# Altium PCB ice.PcbDoc (part 2 of 2)
Units mm, origin at the board's own origin, x right, y up, seen from the top; angles counter-clockwise.
Board outline 65 x 30 mm, 4 copper layers (Top Layer, GND, L3, Bottom Layer), stack 1.576 mm thick; 116 components, 101 nets, 444 pads, 153 vias.
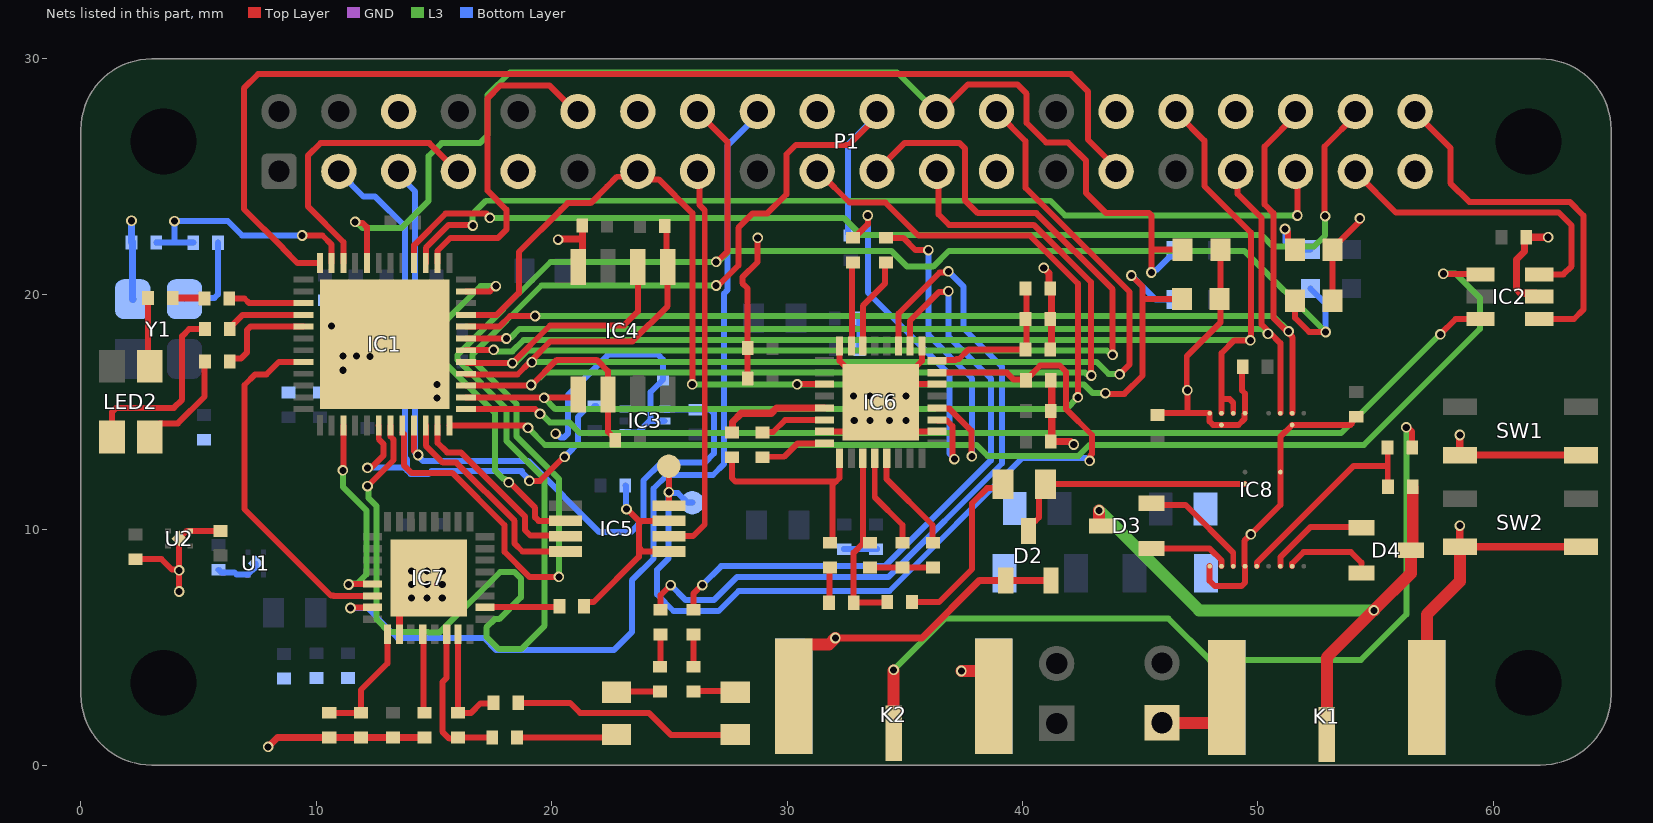
[diagram p4: the nets of this part, all layers, seen from the top]

## Via types
v1: diameter 0.45, hole 0.3, Top Layer to Bottom Layer, 153 vias

## Nets (pads, with @x,y where several pads share a name; then routed paths per layer and width w, separated by ;. In a path a pad name is that pad's centre, name@x,y a point inside that pad or via, vN(x,y) a via of type N, cw(c..) or ccw(c..) an arc to the next point about the centre after c; other vN are vias at no path point) (continued)
D11: IC1.3 IC7.21 | length 8.7
  Top Layer w0.254: v1(11.125,12.525) 11.15,12.55 IC1.3@11.15,14.425 ; v1@11.375,7.7 11.379,7.696 IC7.21@12.387,7.696
  L3 w0.254: v1(11.125,12.525) 11.125,11.825 12.125,10.825 12.125,8.1 11.738,7.713 11.413,7.713 v1(11.375,7.675)
DAC_CS: IC1.23 IC5.2 | length 15.5
  Top Layer w0.254: IC1.23@16.35,20.125 17.375,20.125 17.625,20.375 v1@17.625,20.4 ; v1(18.175,12.01) 18.215,12.01 19.293,10.932 19.293,10.524 19.442,10.375 IC5.2@20.575,10.375
  L3 w0.254: v1(17.625,20.35) 16.975,20.35 15.484,18.859 15.484,17.066 17.6,14.95 17.6,12.511 17.963,12.148 18.024,12.148 18.162,12.01 v1(18.175,12.01)
dac_g: C41.2 IC5.8 IC6.15 SP1.1 SP2.1 | length 39.1
  Top Layer w0.254: IC5.8@24.975,11.025 v1(24.975,11.6) SP1.1@24.975,12.7 ; IC6.15@36.363,16.67 39.33,16.67 39.625,16.375 40.15,16.375 40.175,16.35 40.175,16.4 40.75,16.975 41.575,16.975 41.85,16.7 41.85,15.125 42.95,14.025 42.95,13.211 42.884,13.144 42.884,12.966 v1(42.846,12.929)
  Bottom Layer w0.254: SP2.1@25.975,11.15 25.773,11.15 25.361,11.562 25.013,11.562 v1(24.975,11.6) 24.95,11.575 24.95,8.775 24.475,8.3 24.475,7.25 25.175,6.55 27.087,6.55 27.937,7.4 34.35,7.4 40,13.05 42.725,13.05 v1(42.846,12.929)
DAC_HV: IC5.6 P1.15 | length 16.7
  Top Layer w0.254: IC5.6@24.975,9.725 26,9.725 26.5,10.225 26.5,23.575 26.27,23.805 P1.15@26.27,25.125
DAC_MOSI: IC1.10 IC5.4 | length 9.1
  Top Layer w0.254: IC1.10@14.65,14.425 14.65,13.575 15.375,12.85 15.95,12.85 18.425,10.375 18.425,9.406 18.756,9.075 IC5.4@20.425,9.075
DAC_SCLK: IC1.11 IC5.3 | length 8
  Top Layer w0.254: IC1.11@15.15,14.425 15.15,13.689 15.555,13.284 16.141,13.284 18.859,10.566 18.859,9.99 19.099,9.75 20.4,9.75 IC5.3@20.425,9.725
DCLK: IC1.44 IC7.22 | length 15.1
  Top Layer w0.254: IC1.44@9.45,17.125 9.448,17.123 8.405,17.123 7.882,16.6 7.4,16.6 6.95,16.15 6.95,10.875 10.625,7.2 10.725,7.2 10.737,7.188 IC7.22@12.387,7.188
DONE: IC1.7 LED1.2 P1.16 R4.1 | length 87.8
  Top Layer w0.254: v1(12.172,11.853) 13.284,12.965 13.284,13.83 13.152,13.962 13.152,14.423 IC1.7@13.15,14.425 ; P1.16@26.27,27.665 27.475,26.46 27.475,21.834 27.075,21.434 27.034,21.434 v1(26.981,21.381) ; LED1.2@51.575,19.725 51.575,19 52.175,18.4 v1(52.875,18.4)
  L3 w0.254: v1(12.172,11.853) 12.21,11.815 12.21,11.354 12.559,11.005 12.559,6.191 13.1,5.65 14.75,5.65 14.775,5.625 15.225,5.625 17.8,8.2 18.425,8.2 18.691,7.934 18.691,7.125 17.766,6.2 17.575,6.2 17.225,5.85 17.225,5.45 17.75,4.925 18.7,4.925 19.7,5.925 19.7,12.15 18.075,13.775 18.075,15.15 16.005,17.22 16.005,17.43 19.95,21.375 26.975,21.375 v1(26.981,21.381) ; v1@27.075,21.375 27.55,21.85 34.425,21.85 35.1,21.175 36.2,21.175 36.875,21.85 49.425,21.85 v1(52.875,18.4)
  Bottom Layer w0.254: R4.1@52.225,20.25 52.875,19.6 v1(52.875,18.4)
EA_CLK: IC1.36 P1.29 | length 49.7
  Top Layer w0.254: IC1.36@10.15,21.325 9.2,21.325 8.575,21.95 8.575,21.975 6.925,23.625 6.925,28.75 7.525,29.35 42.05,29.35 42.775,28.625 42.775,26.575 44.05,25.3 P1.29@44.05,25.125
F_CS: IC1.16 IC4.1 P1.26 R13.1 | length 52
  Top Layer w0.254: IC1.16@16.35,16.625 16.381,16.594 18.544,16.594 19.065,17.115 v1(19.16,17.115) ; v1@19.112,17.162 19.95,18 23.425,18 24.925,19.5 24.925,21.157 IC4.1@24.93,21.162 24.865,21.227 24.865,22.835 R13.1@24.8,22.9 ; P1.26@38.97,27.665 40.125,26.51 40.125,24.525 44.55,20.1 44.55,17.025 v1(44.125,16.6)
  L3 w0.254: v1(19.16,17.115) 19.169,17.125 43.15,17.125 43.65,16.625 44.1,16.625 v1(44.125,16.6)
F_MISO: IC1.17 IC4.2 P1.21 | length 53.2
  Top Layer w0.254: IC1.17@16.35,17.125 16.4,17.075 v1(18.325,17.075) 19.925,18.675 23.064,18.675 23.66,19.271 IC4.2@23.66,21.162 ; P1.21@33.89,25.125 33.89,25.34 34.975,26.425 37.326,26.425 37.55,26.201 37.55,24 38.1,23.45 40.586,23.45 43.825,20.211 v1(43.825,17.425)
  L3 w0.254: v1(18.325,17.075) 18.363,17.113 18.476,17.113 18.98,17.616 43.581,17.616 43.772,17.425 v1(43.825,17.425)
F_MOSI: IC1.14 IC4.5 P1.19 | length 45.7
  Top Layer w0.254: IC1.14@16.35,15.625 21.007,15.625 IC4.5@21.12,15.738 ; P1.19@31.35,25.125 31.425,25.125 32.65,23.9 34.175,23.9 35.575,22.5 40.309,22.5 42.35,20.459 v1(42.35,15.625)
  L3 w0.254: v1(19.675,15.6) 20.15,15.125 41.85,15.125 v1(42.35,15.625)
F_SCLK: IC1.15 IC4.6 P1.23 R14.2 | length 47.2
  Top Layer w0.254: IC1.15@16.35,16.125 19.125,16.125 20.216,17.216 21.909,17.216 22.39,16.735 IC4.6@22.39,15.738 22.39,14.16 22.7,13.85 R14.2@22.7,13.8 ; P1.23@36.43,25.125 36.43,23.395 36.875,22.95 40.472,22.95 42.9,20.522 42.9,16.575 v1(42.925,16.55)
  L3 w0.254: v1(19.125,16.15) 19.178,16.15 19.703,16.675 42.661,16.675 42.749,16.588 42.887,16.588 v1(42.925,16.55)
GND: C1.1 C2.1 C3.1 C4.1 C5.1 C6.1 C7.1 C8.1 C9.1 C10.1 C11.1 C12.1 C13.1 C14.2 C15.2 C16.2 C17.1 C18.2 C19.2 C20.2 C31.2 C32.2 C33.1 C34.1 C35.2 C36.2 C37.1 C38.1 C39.1 C40.1 C41.1 C42.1 C43.1 C44.1 C45.1 C48.1 C49.1 C50.1 C51.1 C52.1 C53.1 C54.2 C55.2 C56.2 C57.2 D2.1 D2.2 IC1.49 IC2.2 IC3.2 IC3.4 IC4.4 IC5.5 IC5.7 IC6.10 IC6.14 IC6.17 IC6.24 IC6.31 IC6.33 IC7.26 IC7.33 IC8.A1 IC8.A4 IC8.B2 IC8.B8 IC8.F7 IC8.P1 IC8.P4 K1.2 K2.2 K4.1 LED1.1 LED3.1 LED4.1 LED5.1 P1.6 P1.9 P1.14 P1.20 P1.25 P1.30 P1.34 P1.39 R16.2 R24.1 SW1.1 SW1.2 SW2.1 SW2.2 U1.2 U1.5 U2.2 U2.5 Y1.2 | length 156.4
  Top Layer w0.254: C12.1@2.325,8.75 3.425,8.75 3.863,8.313 4.137,8.313 v1(4.175,8.275) ; v1(4.175,7.375) v1(4.175,8.275) ; C13.1@5.925,9.95 U2.2@4.65,9.95 4.5,9.95 U2.5@4.175,9.625 v1(4.175,8.275) ; C31.2@21.375,6.75 21.375,6.8 21.498,6.923 21.773,6.923 23.7,8.85 23.7,9.25 ; v1@23.125,10.95 23.7,10.375 ; IC5.5@24.975,9.075 23.875,9.075 23.7,9.25 ; IC5.7@24.975,10.375 23.7,10.375 ; C40.1@28.325,16.425 C39.1@28.325,17.725 28.325,20.25 28.1,20.475 28.1,20.725 28.75,21.375 28.75,22.375 v1@28.725,22.4 ; IC6.31@31.587,14.18 32.73,14.18 IC6.33@33.975,15.425 ; IC6.24@32.222,17.813 32.222,17.178 IC6.33@33.975,15.425 ; IC6.17@35.728,17.813 35.728,17.178 IC6.33@34.737,16.187 ; IC6.10@36.363,14.18 35.22,14.18 IC6.33@33.975,15.425 ; IC6.14@36.363,16.187 IC6.33@34.737,16.187 ; C36.2@45.725,14.875 45.799,14.949 46.874,14.949 ; C36.2@45.8,14.95 46.95,14.95 ; IC8.P1@47.95,8.45 47.95,7.825 48.175,7.6 49.301,7.6 49.45,7.749 IC8.P4@49.45,8.45 49.425,8.475 49.425,9.525 v1(49.7,9.8) 50.95,11.05 IC8.F7@50.95,12.45 50.95,13.95 IC8.B8@51.45,14.45 53.925,14.45 54.002,14.527 54.002,14.664 54.125,14.787 C35.2@54.175,14.787 ; LED3.1@48.4,21.9 48.4,19.8 48.4,18.8 46.975,17.375 46.975,15.95 v1(47,15.925) 47,15 46.95,14.95 ; C32.2@49.325,16.925 49.325,15.914 49.45,15.789 IC8.A4@49.45,14.95 49.425,14.925 49.425,14.7 49.175,14.45 IC8.B2@48.45,14.45 48.099,14.45 47.95,14.599 IC8.A1@47.95,14.95 46.95,14.95 ; LED1.1@53.175,19.725 LED5.1@53.175,21.9 53.175,21.95 54.325,23.1 v1(54.325,23.225) ; 23.7,9.25 23.7,10.375 ; IC6.33@33.975,15.425 IC6.33@34.737,16.187
  Top Layer w0.305: v1(7.95,0.775) 8.35,1.175 C20.2@10.55,1.175 R16.2@14.6,1.175 ; IC7.26@13.53,5.562 13.53,6.705 IC7.33@14.775,7.95 ; v1@20.275,22.35 20.277,22.352 21.3,22.352 ; IC4.4@21.12,21.162 21.12,21.6 21.3,21.779 21.3,22.352 ; C16.2@21.3,22.925 21.3,22.352 ; v1(32.05,5.4) 35.725,5.4 38.175,7.85 39.39,7.85 D2.2@41.31,7.85 ; v1(40.9,21.125) 41.127,20.898 41.127,20.348 41.225,20.25 41.225,18.95 C48.1@41.225,17.65 ; C41.1@41.225,16.35 41.237,16.337 41.237,13.762 41.25,13.75 42.044,13.75 v1(42.175,13.619) ; v1@58.575,14 SW1.1@58.575,13.173 SW1.2@63.725,13.173 ; v1@58.6,10.175 58.575,10.15 SW2.1@58.575,9.275 SW2.2@63.725,9.275 ; IC2.2@61.95,19.9 61.802,20.048 61.163,20.048 60.984,20.226 60.984,21.484 61.325,21.825 61.325,22.35 C14.2@61.4,22.425 v1(62.325,22.425)
  Top Layer w0.508: K2.2@30.275,2.925 30.275,4.575 30.821,5.121 31.771,5.121 v1(32.05,5.4) ; v1(37.4,4) 38.229,4 38.775,3.454 K2.2@38.775,2.925 ; K4.1@45.925,1.8 48.129,1.8 48.675,2.346 K1.2@48.675,2.875 ; K1.2@57.175,2.875 57.175,6.4 58.575,7.8 SW2.1@58.575,9.275
  Bottom Layer w0.254: C10.1@5.85,8.3 5.973,8.177 6.531,8.177 6.608,8.1 U1.2@7.1,8.1 7.425,8.425 U1.5@7.425,8.575 ; C7.1@10.375,19.75 C2.1@11.675,19.75 C1.1@12.975,19.75 ; v1(10.65,18.65) v1@10.688,18.688 ; C9.1@15.1,19.75 15.125,19.725 15.125,17.175 C5.1@15.15,17.15 15.138,17.137 15.138,16.188 v1(15.125,16.175) ; v1(20.167,14.081) 20.22,14.081 20.375,13.926 20.526,13.926 20.684,14.084 20.684,15.709 22.425,17.45 24.5,17.45 24.725,17.225 C15.2@24.725,16.425 24.725,16.375 24.2,15.85 24.2,14.674 24.151,14.625 ; IC3.4@23.124,14.125 23.651,14.125 24.125,14.599 24.151,14.625 ; C17.1@23.125,11.875 23.15,11.85 23.15,10.9 v1(23.175,10.875) ; IC3.2@24.8,14.625 24.151,14.625 ; C52.1@32.425,9.175 C53.1@33.775,9.175 C53.1@33.825,9.175 ; C51.1@33.075,17.675 C50.1@33.075,18.975 ; v1@35.038,14.631 v1(35.05,14.644) v1@35.088,14.606
  Bottom Layer w0.305: C57.2@2.15,22.2 v1(2.15,23.125) ; C57.2@2.175,22.225 2.187,22.213 2.187,19.804 Y1.2@2.2,19.791
  other v1: 14.05,7.1 14.7,7.1 15.35,7.1 14.05,7.675 14.7,7.675 15.35,7.675 14.05,8.25 14.7,8.25 15.35,8.25 58.575,10.175 58.575,14.025 32.85,14.644 33.525,14.644 34.35,14.644 15.125,15.6 32.825,15.675 33.525,15.675 34.35,15.675 35.05,15.675 11.125,16.775 12.275,17.35 11.125,17.375 11.7,17.375 20.275,22.325 28.75,22.4
HILO: IC1.21 IC6.27 LED4.2 P1.13 R9.1 | length 50.9
  Top Layer w0.254: IC1.21@16.35,19.125 17.661,19.125 18.6,20.064 18.6,21.8 20.4,23.6 20.675,23.875 21.65,23.875 22.35,24.575 22.769,24.994 23.599,24.994 23.73,25.125 P1.13@23.73,24.98 ; P1.13@23.7,25.095 23.7,24.728 23.859,24.887 24.538,24.887 25.975,23.45 25.975,16.181 v1(25.969,16.175) ; v1@30.387,16.187 IC6.27@31.587,16.187 ; v1(43.519,15.801) 43.545,15.775 44.325,15.775 45.1,16.55 45.1,19.8 ; v1(44.619,20.801) 45.1,20.32 45.1,19.8 ; LED4.2@46.775,19.8 45.1,19.8
  L3 w0.254: v1(25.969,16.175) v1(30.425,16.175) 42.6,16.175 42.975,15.8 v1@43.475,15.8
  Bottom Layer w0.254: v1@44.575,20.85 45.65,19.775 R9.1@46.525,19.775
HV_EN: IC1.34 P1.7 | length 12.4
  Top Layer w0.254: IC1.34@11.15,21.325 11.15,22.225 9.65,23.725 9.65,25.9 10.175,26.425 14.8,26.425 P1.7@16.1,25.125
ICE_CS: IC1.32 LED3.2 P1.24 R8.1 | length 51.1
  Top Layer w0.254: v1(11.65,23.075) 11.687,23.038 11.962,23.038 12.15,22.85 IC1.32@12.15,21.325 ; P1.24@36.43,27.665 37.681,28.916 39.776,28.916 40.175,28.517 40.175,27.275 41,26.45 41.925,26.45 42.7,25.675 42.7,24.3 43.55,23.45 45.375,23.45 45.469,23.356 45.469,21.85 ; v1(45.469,20.926) 45.469,21.85 ; LED3.2@46.8,21.9 45.519,21.9 45.469,21.85
  L3 w0.254: v1(11.65,23.075) 11.703,23.075 11.969,22.809 13.609,22.809 14.775,23.975 14.775,25.875 15.325,26.425 16.95,26.425 17.275,26.75 17.275,28.475 18.225,29.425 34.67,29.425 P1.24@36.43,27.665
  Bottom Layer w0.254: v1@45.55,21 45.575,21.025 45.675,21.025 R8.1@46.525,21.875
Lblue: IC1.41 R5.2 | length 4.3
  Top Layer w0.254: R5.2@6.325,17.15 6.44,17.265 6.79,17.265 7.05,17.525 7.05,18.476 7.199,18.625 IC1.41@9.45,18.625
Lgreen: IC1.40 R7.2 | length 3.4
  Top Layer w0.254: R7.2@6.325,18.525 6.325,18.575 6.875,19.125 IC1.40@9.45,19.125
Lred: IC1.39 R2.2 | length 3.2
  Top Layer w0.254: R2.2@6.25,19.85 R2.2@6.275,19.825 ; R2.2@6.35,19.825 6.95,19.825 7.15,19.625 IC1.39@9.45,19.625
NetC19_1: C19.1 C20.1 IC7.25 | length 5.2
  Top Layer w0.254: C20.1@10.55,2.225 C19.1@11.9,2.225 11.9,3.2 13.025,4.325 13.025,5.56 IC7.25@13.022,5.562
NetC21_1: C21.1 IC6.30 | length 2.8
  Top Layer w0.254: C21.1@28.95,14.15 29.4,14.15 29.913,14.663 IC6.30@31.587,14.663
NetC21_2: C21.2 IC6.32 | length 2.9
  Top Layer w0.254: C21.2@28.95,13.1 29.875,13.1 30.447,13.672 IC6.32@31.587,13.672
NetC22_1: C22.1 IC6.29 | length 4.6
  Top Layer w0.305: C22.1@27.65,14.125 27.675,14.15 27.675,14.575 28.05,14.95 29.325,14.95 29.546,15.171 IC6.29@31.587,15.171
NetC22_2: C22.2 IC6.1 R17.1 | length 9.1
  Top Layer w0.254: C22.2@27.65,13.075 27.65,12.199 27.799,12.05 32.074,12.05 ; R17.1@31.825,9.45 31.925,9.55 31.925,11.901 32.074,12.05 ; IC6.1@32.222,13.037 32.222,12.199 32.074,12.05
NetC23_1: C23.1 C25.1 C28.1 IC6.3 | length 7.7
  Top Layer w0.254: IC6.3@33.213,13.037 33.213,9.413 32.825,9.025 C23.1@32.825,6.9 32.837,6.912 34.238,6.912 C25.1@34.25,6.925
NetC23_2: C23.2 R17.2 | length 1.5
  Top Layer w0.254: C23.2@31.775,6.9 31.8,6.925 31.8,8.375 R17.2@31.825,8.4
NetC24_1: C24.1 IC7.30 R18.2 | length 6.5
  Top Layer w0.254: IC7.30@15.537,5.562 15.537,3.712 15.35,3.525 15.35,1.425 15.65,1.125 15.975,1.125 C24.1@16.025,1.175 R18.2@17.475,1.175
NetC24_2: C24.2 IC7.31 R15.2 | length 5
  Top Layer w0.254: IC7.31@16.02,5.562 16.022,5.56 16.022,2.228 C24.2@16.025,2.225 16.575,2.225 16.975,2.625 17.5,2.625 R15.2@17.525,2.65
NetC25_2: C25.2 L3.2 | length 7.8
  Top Layer w0.254: C25.2@35.3,6.925 36.45,6.925 37.85,8.325 37.85,11.125 38.493,11.768 39.293,11.768 L3.2@39.375,11.85
NetC26_1: C26.1 L1.1 | length 1.8
  Top Layer w0.254: C26.1@26.025,3.15 27.75,3.15 L1.1@27.8,3.1
NetC26_2: C26.2 R19.2 | length 1.4
  Top Layer w0.254: C26.2@26.025,4.175 R19.2@26.025,5.55
NetC27_1: C27.1 L2.1 | length 1.9
  Top Layer w0.254: L2.1@22.75,3.1 22.775,3.125 C27.1@24.6,3.125
NetC27_2: C27.2 R20.2 | length 1.4
  Top Layer w0.254: C27.2@24.6,4.175 24.613,4.187 24.613,5.537 R20.2@24.625,5.55
NetC28_2: C28.2 C29.2 C30.2 | length 2.7
  Top Layer w0.254: C28.2@33.525,8.4 C30.2@36.2,8.4
NetC29_1: C29.1 IC6.4 | length 4.1
  Top Layer w0.254: IC6.4@33.721,13.037 33.721,11.379 34.9,10.2 C29.1@34.9,9.45
NetC30_1: C30.1 IC6.5 | length 4.4
  Top Layer w0.254: IC6.5@34.229,13.037 34.229,12.146 36.175,10.2 36.175,9.475 C30.1@36.2,9.45
NetC31_1: C31.1 IC7.2 | length 3.2
  Top Layer w0.254: IC7.2@17.163,6.705 17.185,6.728 20.303,6.728 C31.1@20.325,6.75
NetC46_1: C46.1 IC6.11 | length 15.4
  Top Layer w0.254: C46.1@32.8,22.4 32.85,22.4 33.425,22.975 v1(33.425,23.35) ; IC6.11@36.363,14.663 36.388,14.638 36.785,14.638 37.025,14.398 37.025,13.128 37.062,13.091 37.062,12.987 v1@37.025,12.949
  Bottom Layer w0.254: v1(33.425,23.35) 33.425,20.075 36.891,16.609 36.891,13.247 37.1,13.038 v1(37.1,13)
NetC46_2: C46.2 IC6.23 | length 3.6
  Top Layer w0.254: IC6.23@32.73,17.813 32.756,17.838 32.756,21.306 C46.2@32.8,21.35
NetC47_1: C47.1 IC6.12 | length 14.5
  Top Layer w0.254: C47.1@34.2,22.4 34.925,22.4 35.45,21.875 v1(36,21.875) ; IC6.12@36.363,15.171 36.388,15.146 36.891,15.146 37.825,14.212 37.825,13.144 v1(37.85,13.119)
  Bottom Layer w0.254: v1(36,21.875) 36,18.275 37.85,16.425 37.85,13.15 v1(37.85,13.119)
NetC47_2: C47.2 IC6.22 | length 3.9
  Top Layer w0.254: IC6.22@33.213,17.813 33.213,19.513 34.15,20.45 34.15,21.3 C47.2@34.2,21.35
NetC48_2: C48.2 C49.2 IC6.16 R24.2 | length 6.6
  Top Layer w0.254: IC6.16@36.363,17.178 36.385,17.2 37.15,17.2 37.2,17.25 37.3,17.25 37.7,17.65 40.175,17.65 40.175,18.95 R24.2@40.175,20.25
NetD2_3: D2.3 IC8.G4 L3.1 | length 10.4
  Top Layer w0.254: D2.3@40.35,9.95 40.35,10.175 40.548,10.373 40.551,10.373 40.7,10.522 40.7,11.65 L3.1@40.975,11.925 ; L3.1@41.25,11.925 41.275,11.95 IC8.G4@49.45,11.95
NetD3_1: D3.1 IC8.P2 | length 3.4
  Top Layer w0.254: D3.1@45.475,9.2 47.95,9.2 48.45,8.7 IC8.P2@48.45,8.45
NetD3_2: D3.2 IC8.P3 | length 4.9
  Top Layer w0.254: D3.2@45.475,11.12 45.545,11.05 46.925,11.05 48.95,9.025 IC8.P3@48.95,8.45
NetD3_3: D3.3 D4.3 K1.1 R22.1 | length 26.2
  Top Layer w0.508: v1(43.25,10.825) 43.25,10.231 43.321,10.16 D3.3@43.375,10.16 ; K1.1@52.925,1.3 52.925,4.575 v1(54.925,6.575) 56.5,8.15 D4.3@56.5,9.125 56.504,9.125 56.575,9.196 R22.1@56.575,11.825
  L3 w0.508: v1(43.25,10.825) 47.5,6.575 v1(54.925,6.575)
NetD4_1: D4.1 IC8.P7 | length 4.3
  Top Layer w0.254: IC8.P7@50.95,8.45 50.95,8.836 52.239,10.125 D4.1@54.375,10.125
NetD4_2: D4.2 IC8.P8 | length 3.5
  Top Layer w0.254: IC8.P8@51.45,8.45 51.45,8.564 51.936,9.05 53.95,9.05 54.4,8.6 54.4,8.54
NetIC6_18: IC6.18 R19.1 | length 26.8
  Top Layer w0.254: R19.1@26.025,6.6 26.025,7.3 v1@26.375,7.65 ; IC6.18@35.22,17.813 35.22,18.87 36.444,20.094 36.812,20.094 v1(36.85,20.132)
  Bottom Layer w0.254: v1(26.4,7.65) 27.2,8.45 34.15,8.45 38.65,12.95 38.65,16.425 36.85,18.225 v1(36.85,20.132)
NetIC6_19: IC6.19 R20.1 | length 31.1
  Top Layer w0.254: R20.1@24.625,6.6 24.625,7.225 v1@25,7.6 ; IC6.19@34.737,17.813 34.737,19.187 36.475,20.925 v1@36.8,20.925
  Bottom Layer w0.254: v1(25.05,7.65) 25.675,7.025 26.9,7.025 27.875,8 34.314,8 39.125,12.811 39.125,16.925 37.5,18.55 37.5,20.325 v1(36.85,20.975)
NetIC7_28: IC7.28 R16.1 | length 3.4
  Top Layer w0.254: IC7.28@14.521,5.562 14.546,5.537 14.546,2.279 R16.1@14.6,2.225
NetIC8_P5: IC8.P5 R22.2 R23.1 | length 9.1
  Top Layer w0.254: IC8.P5@49.95,8.45 49.95,8.6 54.05,12.7 55.475,12.7 55.513,12.663 ; R23.1@55.5,13.5 55.513,13.488 55.513,12.663 ; R22.2@55.525,11.825 55.513,11.837 55.513,12.663
NetK2_1: K2.1 R23.2 | length 35.8
  Top Layer w0.254: v1@56.35,14.375 56.55,14.175 R23.2@56.55,13.5
  Top Layer w0.508: K2.1@34.525,1.35 v1@34.525,4.025
  L3 w0.254: v1(34.525,4.05) 36.7,6.225 46.2,6.225 47.95,4.475 54.375,4.475 56.3,6.4 v1(56.3,14.35)
NetL1_2: L1.2 R15.1 | length 9.8
  Top Layer w0.254: R15.1@18.575,2.65 20.775,2.65 21.2,2.225 24.125,2.225 25.075,1.275 27.775,1.275 L1.2@27.8,1.3
NetL2_2: L2.2 R18.1 | length 4.3
  Top Layer w0.254: R18.1@18.525,1.175 22.625,1.175 L2.2@22.75,1.3
NetLED2_1: LED2.1 R1.1 | length 2.9
  Top Layer w0.254: R1.1@2.85,19.85 2.85,17.019 LED2.1@2.925,16.945
NetLED2_3: LED2.3 R5.1 | length 4.6
  Top Layer w0.254: LED2.3@2.925,13.945 2.925,14.095 3.348,14.518 4.118,14.518 5.25,15.65 5.25,17.125 R5.1@5.275,17.15
NetLED2_4: LED2.4 R7.1 | length 8
  Top Layer w0.254: LED2.4@1.325,13.945 1.325,15 1.5,15.175 3.95,15.175 4.3,15.525 4.3,18.225 4.6,18.525 R7.1@5.275,18.525
NetLED5_2: LED5.2 R10.1 | length 2.8
  Top Layer w0.254: v1(51.15,22.775) 51.277,22.648 51.277,22.198 LED5.2@51.575,21.9
  Bottom Layer w0.254: v1(51.15,22.775) 51.175,22.75 51.175,22.225 51.5,21.9 R10.1@52.225,21.9
NetR1_2: R1.2 R2.1 | length 1.4
  Top Layer w0.305: R1.2@3.9,19.85 3.912,19.838 5.238,19.838 R2.1@5.25,19.825
NetR25_2: R25.2 Y1.3 | length 3.7
  Bottom Layer w0.254: Y1.3@4.4,19.791 4.459,19.85 5.676,19.85 5.825,19.999 5.825,21.05 R25.2@5.825,22.193
OutRange: IC7.23 P1.18 | length 39.3
  Top Layer w0.254: v1@11.5,6.7 11.505,6.705 IC7.23@12.387,6.705
  Bottom Layer w0.254: v1(11.45,6.675) 12.175,6.675 13.45,5.4 17.125,5.4 17.625,4.9 22.65,4.9 23.4,5.65 23.4,7.85 24.325,8.775 24.325,11.75 24.9,12.325 26.851,12.325 27.323,12.797 27.323,20.036 27.462,20.176 27.462,26.317 P1.18@28.81,27.665
PCM_CLK: IC1.26 P1.12 | length 14.4
  Top Layer w0.254: IC1.26@15.15,21.325 15.15,21.85 15.7,22.4 17.725,22.4 18.075,22.75 18.075,23.6 17.275,24.4 17.275,28.325 17.825,28.875 19.9,28.875 21.11,27.665 P1.12@21.19,27.665
PCM_DIN: IC1.28 P1.38 | length 46.5
  Top Layer w0.254: IC1.28@14.15,21.325 14.152,21.327 14.152,22.091 15.486,23.425 17.225,23.425 17.35,23.3 v1@17.375,23.3 ; v1@52.825,23.325 52.825,26.28 P1.38@54.21,27.665
  L3 w0.254: v1(17.375,23.25) 32.4,23.25 33.125,22.525 50.15,22.525 50.65,22.025 52.375,22.025 52.85,22.5 v1(52.85,23.325)
PCM_FS: IC1.27 P1.35 | length 40.9
  Top Layer w0.254: IC1.27@14.65,21.325 14.652,21.327 14.652,21.977 15.625,22.95 v1@16.65,22.95 ; v1@51.67,23.355 P1.35@51.67,25.125
  GND w0.254: v1(16.65,22.925) v1@16.657,22.925
  L3 w0.254: v1@16.703,22.925 v1(16.65,22.925) 16.625,22.95 16.625,23.4 17.2,23.975 41.186,23.975 41.811,23.35 v1(51.675,23.35)
Pdamp: IC1.18 IC8.A2 IC8.A3 P1.32 | length 49.5
  Top Layer w0.254: IC1.18@16.35,17.625 17.519,17.625 v1(17.532,17.638) ; P1.32@46.59,27.665 46.59,27.66 47.725,26.525 47.725,24.6 49.7,22.625 49.7,18.069 v1(49.675,18.044) 48.994,18.044 48.45,17.5 48.45,15.613 ; IC8.A2@48.45,14.95 48.45,15.613 ; IC8.A3@48.95,14.95 48.95,15.401 48.801,15.55 48.513,15.55 48.45,15.613
  L3 w0.254: v1(17.532,17.638) 17.594,17.575 18.325,17.575 18.8,18.05 49.669,18.05 v1(49.675,18.044)
PHV: IC1.20 IC8.A8 P1.36 | length 49.2
  Top Layer w0.254: IC1.20@16.35,18.625 17.775,18.625 18.228,19.078 v1(19.297,19.078) ; IC8.A8@51.45,14.95 51.475,14.975 51.475,18.175 51.263,18.387 50.65,19 50.65,23.45 50.275,23.825 50.275,26.27 P1.36@51.67,27.665
  L3 w0.254: v1(19.297,19.078) 50.647,19.078 v1(51.3,18.425)
PnHV: IC1.19 IC8.A7 P1.33 | length 45.1
  Top Layer w0.254: IC1.19@16.35,18.125 v1@17.925,18.125 ; P1.33@49.13,25.125 49.13,24.27 50.15,23.25 50.15,18.725 50.488,18.387 50.95,17.925 IC8.A7@50.95,14.95
  L3 w0.254: v1@18.113,18.034 18.113,18.109 18.166,18.163 18.263,18.163 18.625,18.525 50.172,18.525 50.372,18.325 v1(50.425,18.325)
  other v1: 18.075,18.125
RCLK: C57.1 IC1.35 R25.1 | length 10.4
  Top Layer w0.254: v1(9.4,22.5) 10.261,22.5 10.65,22.111 IC1.35@10.65,21.325
  Bottom Layer w0.254: C57.1@3.2,22.2 3.204,22.196 3.988,22.196 ; R25.1@4.775,22.193 4.771,22.196 3.988,22.196 ; v1(9.4,22.5) 6.85,22.5 6.238,23.112 v1(3.975,23.112) 3.975,22.209 3.988,22.196
RESET: IC1.8 P1.22 R3.2 | length 50.8
  Top Layer w0.254: IC1.8@13.652,14.127 13.718,14.061 13.718,12.732 14.034,12.416 15.77,12.416 17.991,10.195 17.991,9.059 19.05,8 v1(20.3,8) ; v1(26.981,20.375) 27.075,20.375 27.925,21.225 27.925,22.825 28.538,23.438 29.163,23.438 29.975,24.25 29.975,25.95 30.375,26.35 32.625,26.35 33.89,27.615 P1.22@33.89,27.665
  L3 w0.254: v1(20.3,8) 20.3,12.164 18.509,13.955 18.509,15.341 16.625,17.225 16.625,17.436 19.564,20.375 v1(26.981,20.375)
  Bottom Layer w0.254: R3.2@32.7,22.5 32.698,22.5 32.575,22.623 32.575,26.35 P1.22@33.89,27.665
SCL: IC1.9 IC3.1 P1.5 R12.2 | length 33.8
  Top Layer w0.254: IC1.9@14.15,14.425 14.152,14.423 14.152,13.351 v1(14.327,13.176)
  Bottom Layer w0.254: P1.5@13.57,25.125 13.57,24.996 14.2,24.366 14.2,13.25 14.525,12.925 19,12.925 22.025,9.9 23.35,9.9 23.891,10.441 23.891,12.091 24.65,12.85 26.5,12.85 26.889,13.239 26.889,14.951 26.74,15.1 R12.2@26.1,15.1 26.087,15.112 24.813,15.112 IC3.1@24.8,15.125
SDA: IC1.6 IC3.6 P1.3 R11.2 | length 29.5
  Top Layer w0.254: v1(12.175,12.625) 12.175,12.65 12.35,12.65 12.85,13.15 12.85,13.65 12.652,13.848 12.652,14.423 IC1.6@12.65,14.425 ; v1(19.05,12.075) 19.5,12.075 v1@20.544,13.119
  Bottom Layer w0.254: P1.3@11.03,25.125 12.005,24.15 12.5,24.15 13.766,22.884 13.766,13.07 13.85,12.986 13.85,12.525 ; v1(12.175,12.625) 12.187,12.637 13.7,12.637 13.738,12.637 13.85,12.525 ; v1(19.05,12.075) 19.05,12.128 18.734,12.444 18.734,12.491 14.891,12.491 14.775,12.375 14,12.375 13.85,12.525 ; v1@20.7,13.244 21.118,13.662 21.118,14.793 21.452,15.127 21.702,15.127 R11.2@21.825,15.25 21.875,15.25 22,15.125 IC3.6@23.124,15.125
  other v1: 20.55,13.094
TOP_T1: IC1.13 IC2.6 | length 45.4
  Top Layer w0.254: IC1.13@16.35,15.125 19.3,15.125 v1(19.5,14.925) ; v1(57.75,18.3) 58.4,18.95 IC2.6@59.45,18.95
  L3 w0.254: v1(19.5,14.925) 19.553,14.925 19.916,14.562 20.738,14.562 21.2,14.1 53.525,14.1 v1@57.65,18.225
TOP_T1_in: IC2.1 P1.40 | length 15.8
  Top Layer w0.254: P1.40@56.75,27.665 56.75,27.65 58.175,26.225 58.175,24.725 58.975,23.925 63.25,23.925 63.825,23.35 63.825,19.35 63.425,18.95 IC2.1@61.95,18.95
TOP_T2: IC1.12 IC2.4 | length 51.4
  Top Layer w0.254: IC1.12@15.65,14.425 18.881,14.425 18.981,14.325 v1(18.99,14.325) ; v1(57.875,20.875) 57.887,20.863 59.438,20.863 IC2.4@59.45,20.85
  L3 w0.254: v1(18.99,14.325) 19.715,13.6 38.049,13.6 38.512,13.138 42.374,13.138 42.837,13.6 54.5,13.6 59.425,18.525 59.425,19.85 58.4,20.875 v1@57.9,20.875
TOP_T2_in: IC2.3 P1.37 | length 13.3
  Top Layer w0.254: P1.37@54.21,25.125 55.86,23.475 62.775,23.475 63.325,22.925 63.325,21.2 62.975,20.85 IC2.3@61.95,20.85
pads on no net: IC3.3 IC6.6 IC6.8 IC6.9 IC6.20 IC7.4 IC7.5 IC7.6 IC7.7 IC7.8 IC7.9 IC7.10 P1.11 P1.27 P1.28 P1.31 Y1.1

## Polygon pours and split planes (outlines as drawn)
GND on GND "GND_L02_P000" (solid, pour order 0): 0,30 0,0 65,0 65,30 58.525,30
GND on Bottom Layer "BTM_GND" (solid, pour order 1): 0,30 -0.025,29.975 -0.025,-0.05 64.975,-0.05 65.05,0.025 64.975,0.1 64.975,29.975

## Silkscreen, mask and mechanical layers (free items; w line width, h text height)
Top Overlay:
  drawing of 486 lines, arcs and shapes, not listed
  text "Layer" at 2.317,123.429 h1.52
  text "Name" at 12.729,123.429 h1.52
  text "Material" at 36.345,123.429 h1.52
  text "Thickness" at 58.183,123.429 h1.52
  text "Constant" at 74.688,123.429 h1.52
  text "Board Layer Stack" at 89.163,123.429 h1.52
  text "Top Overlay" at 12.729,120.381 h1.52
  text "Top Solder" at 12.729,117.333 h1.52
  text "Solder Resist" at 36.345,117.333 h1.52
  text "0,40mil" at 58.183,117.333 h1.52
  text "3,5" at 74.688,117.333 h1.52
  text "1" at 2.317,114.285 h1.52
  text "Top Layer" at 12.729,114.285 h1.52
  text "Copper" at 36.345,114.285 h1.52
  text "1,40mil" at 58.183,114.285 h1.52
  text "Dielectric 2" at 12.729,111.237 h1.52
  text "PP-018" at 36.345,111.237 h1.52
  text "6,00mil" at 58.183,111.237 h1.52
  text "4,3" at 74.688,111.237 h1.52
  text "2" at 2.317,108.189 h1.52
  text "GND" at 12.729,108.189 h1.52
  text "Copper" at 36.345,108.189 h1.52
  text "1,38mil" at 58.183,108.189 h1.52
  text "Dielectric 1" at 12.729,105.141 h1.52
  text "FR-4" at 36.345,105.141 h1.52
  text "44,49mil" at 58.183,105.141 h1.52
  text "4,8" at 74.688,105.141 h1.52
  text "3" at 2.317,102.093 h1.52
  text "L3" at 12.729,102.093 h1.52
  text "Copper" at 36.345,102.093 h1.52
  text "1,38mil" at 58.183,102.093 h1.52
  text "Dielectric 3" at 12.729,99.045 h1.52
  text "PP-018" at 36.345,99.045 h1.52
  text "6,00mil" at 58.183,99.045 h1.52
  text "4,3" at 74.688,99.045 h1.52
  text "4" at 2.317,95.997 h1.52
  text "Bottom Layer" at 12.729,95.997 h1.52
  text "Copper" at 36.345,95.997 h1.52
  text "1,40mil" at 58.183,95.997 h1.52
  text "Bottom Solder" at 12.729,92.949 h1.52
  text "Solder Resist" at 36.345,92.949 h1.52
  text "0,40mil" at 58.183,92.949 h1.52
  text "3,5" at 74.688,92.949 h1.52
  text "Bottom Overlay" at 12.729,89.901 h1.52
  text "PWR" at 54.48,21.48 h1
  text "ICS" at 43.28,21.405 h1
  text "VGA" at 27.825,21.025 h0.7
  text "DONE" at 54.43,19.23 h1
  text "HILO" at 42.255,19.18 h1
  text "TRIG" at 60.755,16.33 h1
  text "DG" at 24.83,13.805 h0.75
  text "FPGA" at 15.325,12.95 h0.7
  text "DAC" at 20.8,7.6 h0.7
  text "+HV" at 42.6,7.375 h0.7
  text "-HV" at 45.2,7.375 h0.7
  text "USER" at 60.605,6.905 h1
  text "ADC" at 9.05,6.7 h0.7
  text "Pulser" at 49.375,6.6 h0.7
  text "GND" at 45.2,6.15 h0.7
  text "+5V" at 42.6,6.125 h0.7
Bottom Overlay:
  drawing of 5 lines, arcs and shapes, not listed
  text "un0rick.cc" at 63.921,21.771 h1.52 r90
  text "lit3-32" at 61.346,21.721 h1.52 r90
  text "DG" at 25.598,10.235 h0.75 r180
  text "O" at 57.575,6.775 h15
  text "FR000016" at 26.3,1.925 h0.95
Shape:
  the board outline again, w0.1